# EAGLE board OpenBook_v24 (EAGLE 9.7.0)
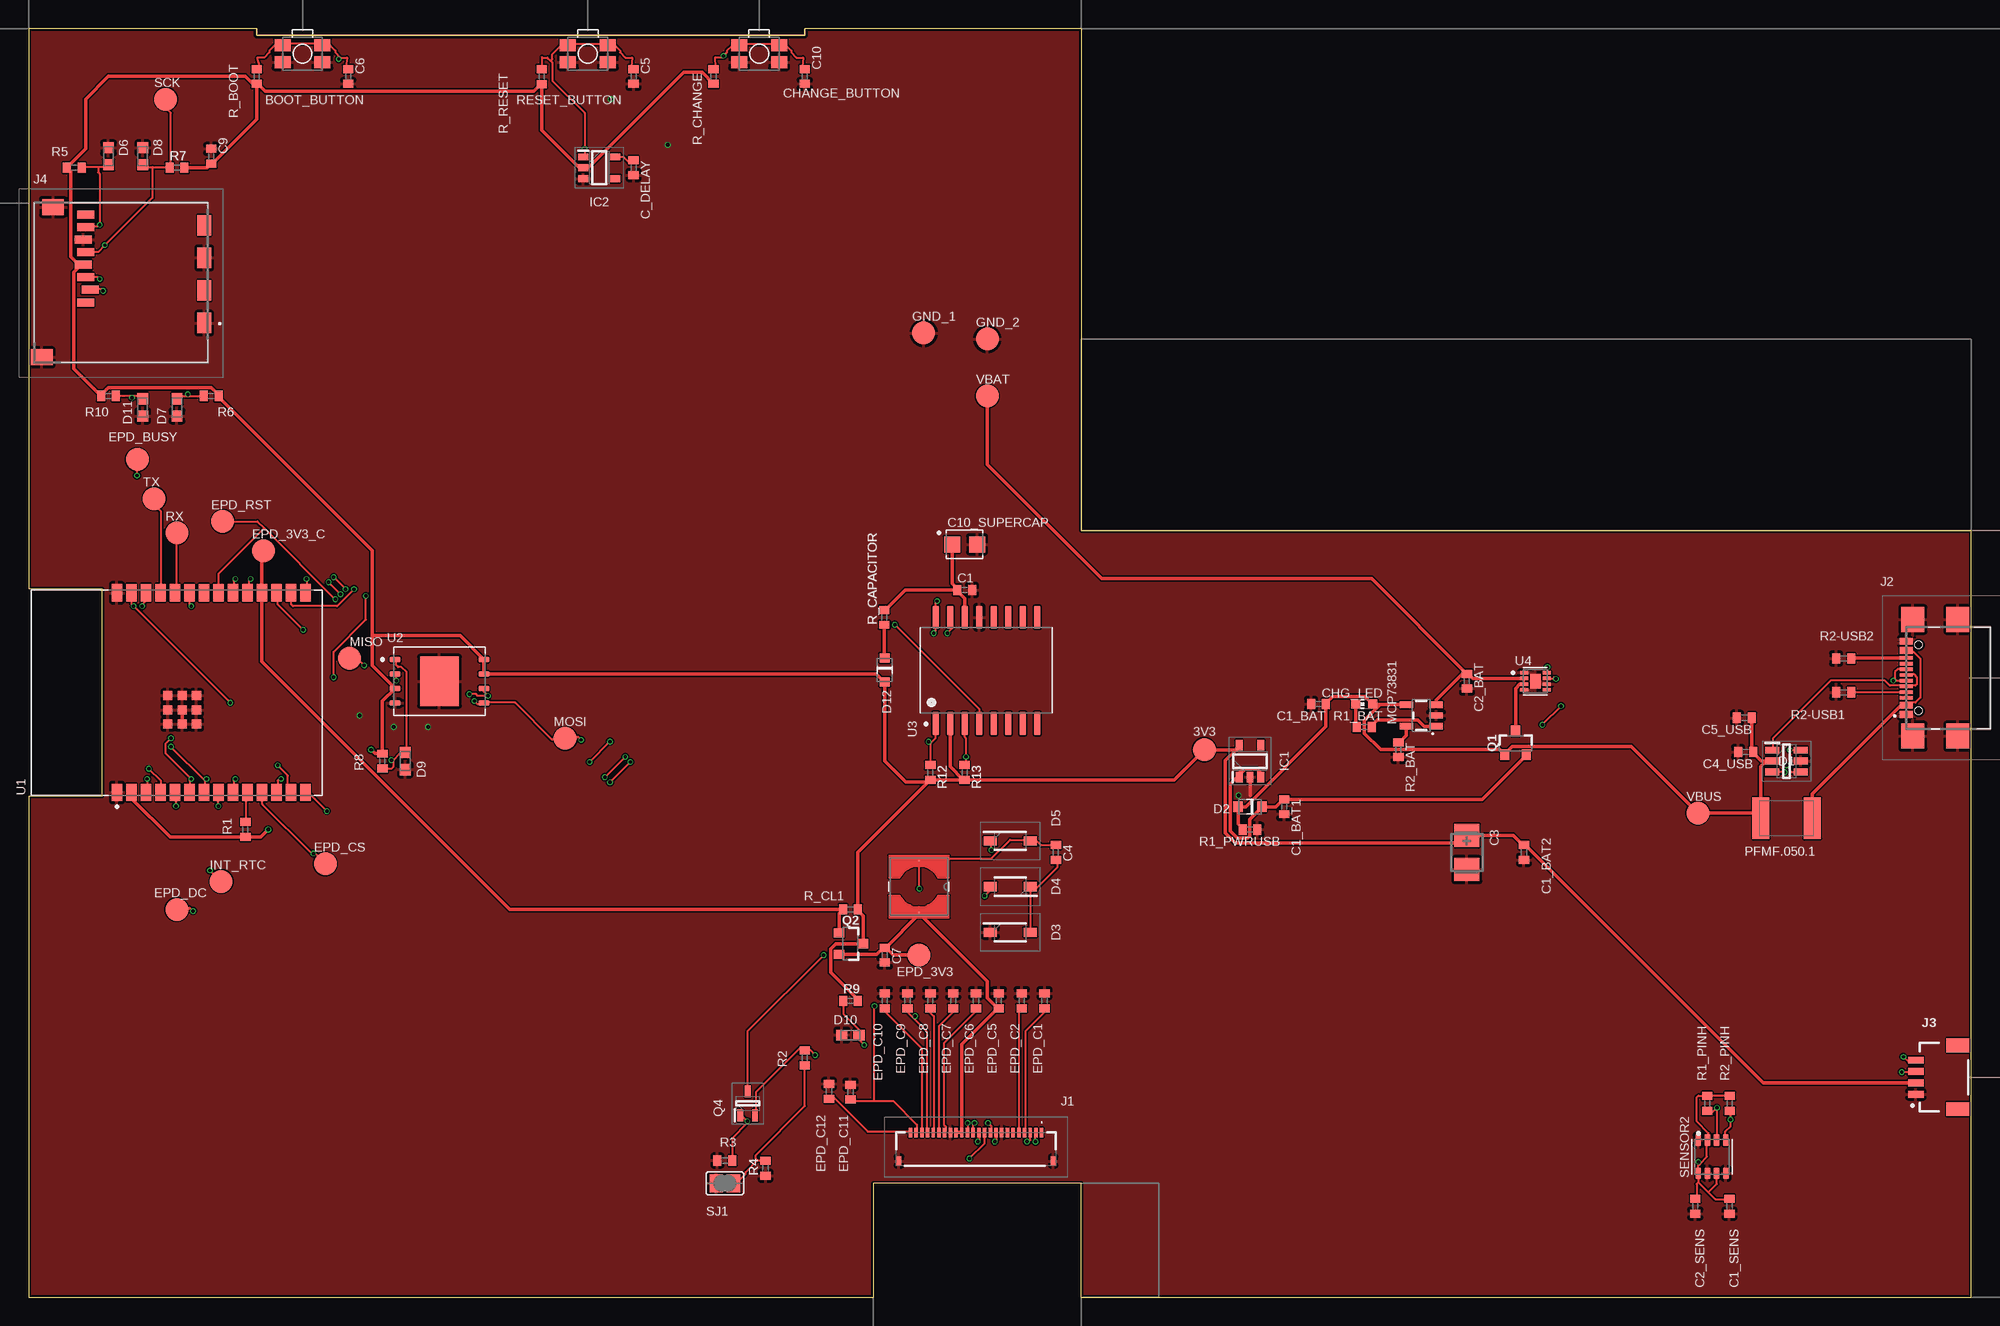
[diagram p0: board, top side]
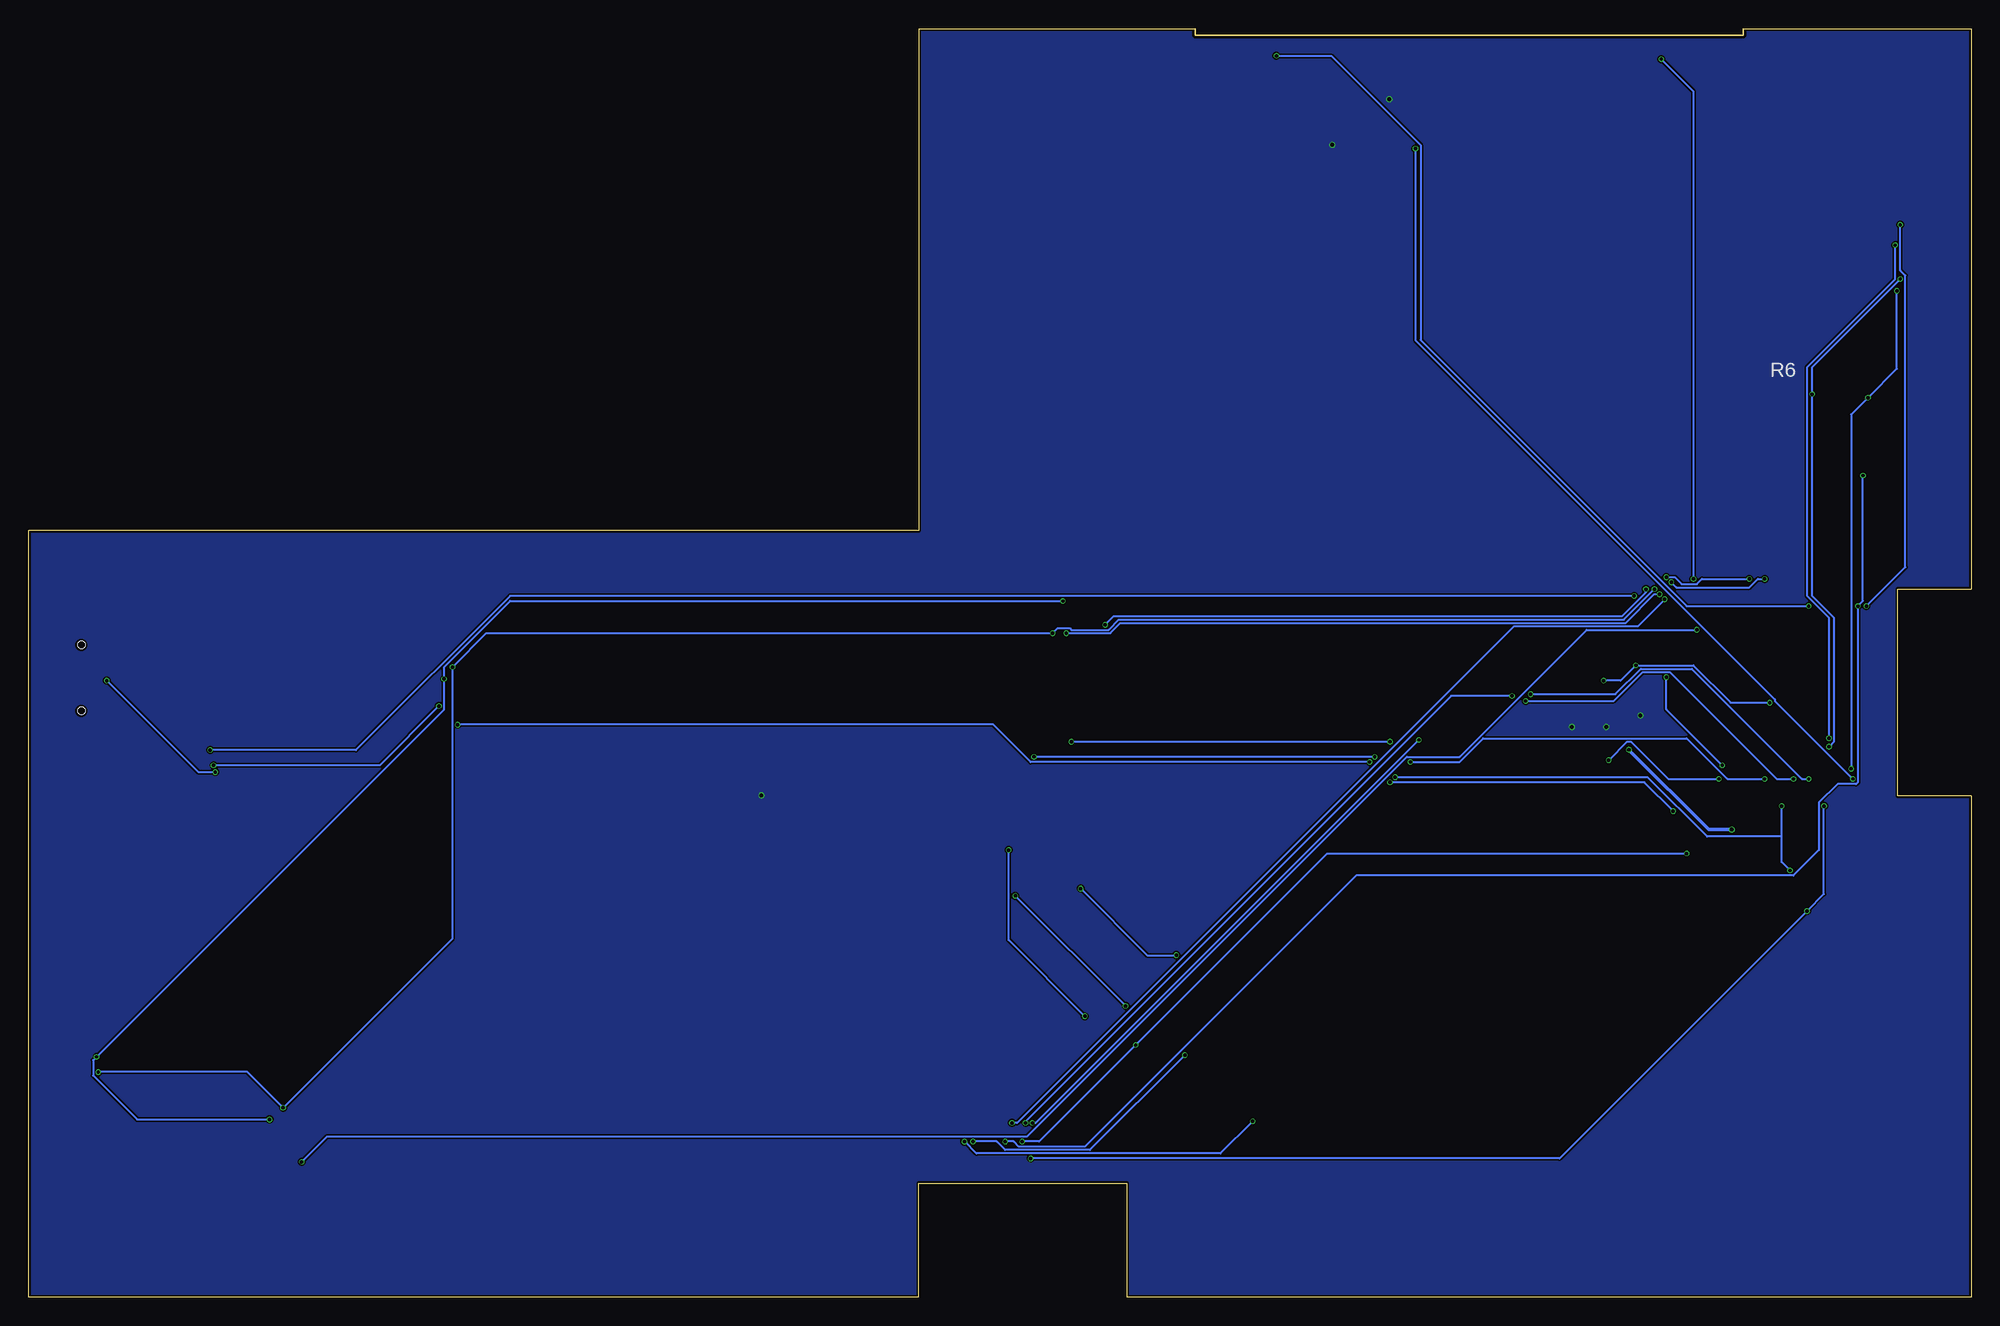
[diagram p1: board, bottom side, seen from below]

Size 170.2 x 111.2 mm. Coordinates in mm from the lower left corner, seen from the top.
Outline: 0,0 74,0 74,10 92.2,10 92.2,0 170.2,0 170.2,67.2 92.2,67.2 92.2,111.2 68.01,111.2 68.01,110.6 19.99,110.6 19.99,111.2 0,111.2 0,62.08 6.46,62.08 6.46,43.94 0,43.94 0,0
Copper layers (1*16): Top 0.035mm / dielectric 1.6mm / Bottom 0.035mm
Design rules "jlcpcb-2layers.dru": minimum track width 5mil, minimum drill 0.3mm, track to track 5mil, track to pad 5mil, pad to pad 5mil, via to via 5mil, smd to smd 5mil, copper to edge 0.2mm, drill to drill 6mil, minimum pad ring 10mil, minimum via ring 3mil, stop-mask expansion 4mil, vias tented up to drill 0mil, thermal gap 10mil

## Footprints (pad centres in the part's own frame; a part is rotated, then mirrored left to right if it is on the bottom)
TP20R = smd 2 x 2: TP 0,0
MYBUTTON = smd 1.4 x 1.05: 1 1.75,0.75; 2 -1.75,0.75; 3 -1.75,-0.75; 4 1.75,-0.75
EAGLE-LTSPICE_C0402 = smd 0.7 x 0.9: 1 -0.65,0; 2 0.65,0
RCL_CT3528 = smd 2 x 2.2: + -1.5,0; - 1.5,0
CAPCP3225X100N = smd 1.4 x 1.4: 1 -1.1,0; 2 1.1,0
ADAFRUIT_CHIP-LED0603 = smd 0.8 x 0.8: A 0,-0.75; C 0,0.75
SOT95P280X145-6N = smd 1.2 x 0.6: 1 -1.25,0.95; 2 -1.25,0; 3 -1.25,-0.95; 4 1.25,-0.95; 5 1.25,0; 6 1.25,0.95
ESP32_WROVER_AVX---SD0805S020S1R0_AVX_SD0805S020S1R0_0 = smd 0.8 x 0.9: 1 -1.05,0; 2 1.05,0
SOD3716X135N = smd 1.15 x 0.8: 1 -1.75,0; 2 1.75,0
DIOC1608X36N = smd 0.97 x 0.94: 1 -0.75,0; 2 0.75,0
SOT95P280X120-5N = smd 0.9 x 0.6: 1 -1.4,0.95; 2 -1.4,0; 3 -1.4,-0.95; 4 1.4,-0.95; 5 1.4,0.95
SOT95P280X125-5N = smd 0.9 x 0.6: 1 -1.4,0.95; 2 -1.4,0; 3 -1.4,-0.95; 4 1.4,-0.95; 5 1.4,0.95
FH34SRJ24S05SH99 = smd 0.3 x 0.8: 1 5.75,1.45; 2 5.25,1.45; 3 4.75,1.45; 4 4.25,1.45; 5 3.75,1.45; 6 3.25,1.45; 7 2.75,1.45; 8 2.25,1.45; 9 1.75,1.45; 10 1.25,1.45; 11 0.75,1.45; 12 0.25,1.45; 13 -0.25,1.45; 14 -0.75,1.45; 15 -1.25,1.45; 16 -1.75,1.45; 17 -2.25,1.45; 18 -2.75,1.45; 19 -3.25,1.45; 20 -3.75,1.45; 21 -4.25,1.45; 22 -4.75,1.45; 23 -5.25,1.45; 24 -5.75,1.45 | smd 0.4 x 0.8: MP1 6.75,-1.05; MP2 -6.75,-1.05
SAMACSYS_PARTS_USB4110GFA = smd 0.3 x 1.15: A1 -3.35,3.678; A4 -2.55,3.678; A5 -1.25,3.678; A6 -0.25,3.678; A7 0.25,3.678; A8 1.25,3.678; A9 2.55,3.678; A12 3.35,3.678; B1 3.05,3.678; B4 2.25,3.678; B5 1.75,3.678; B6 0.75,3.678; B7 -0.75,3.678; B8 -1.75,3.678; B9 -2.25,3.678; B12 -3.05,3.678 | smd 2.18 x 2: MP1 -5.11,-0.827; MP2 5.11,-0.827; MP3 -5.11,3.103; MP4 5.11,3.103 | hole 0.65: -2.89,2.603; 2.89,2.603
JST04_1MM_RA = smd 0.6 x 1.35: 1 -1.5,0; 2 -0.5,0; 3 0.5,0; 4 1.5,0 | smd 1.2 x 2: NC1 2.8,-3.675; NC2 -2.8,-3.675
112ATAARR03ATTEND = smd 1.8 x 1.2: G1 10.6,10.4; G2 4.9,10.4; S1 7.75,10.4; S2 2.05,10.4 | smd 1.4 x 1.9: G3 13.6,-3.85; G4 0.45,-2.85 | smd 0.7 x 1.5: P1 8.8,0; P2 7.7,0.4; P3 6.6,0; P4 5.5,-0.2; P5 4.4,0; P6 3.3,-0.2; P7 2.2,0; P8 1.1,0
IND_4828-WE-TPC_WRE = smd 0.127 x 0.127: 1 -2.286,0; 2 2.286,0
ESP32_WROVER_SPARKFUN-IC-POWER_SOT23-5 = smd 0.55 x 1.2: 1 -0.95,-1.3; 2 0,-1.3; 3 0.95,-1.3; 4 0.95,1.3; 5 -0.95,1.3
ESP32C6_VARISTOR_CT/CN1812 = smd 1.5 x 3.6: 1 -2.25,0; 2 2.25,0
ESP32_WROVER_SPARKFUN-DISCRETESEMI_SOT23-3 = smd 0.8 x 0.9: 1 -0.95,-1; 2 0.95,-1; 3 0,1.1
SOT65P210X110-3N = smd 1.05 x 0.5: 1 -1.05,0.65; 2 -1.05,-0.65; 3 1.05,0
R0402 = smd 0.7 x 0.9: 1 -0.65,0; 2 0.65,0
ESP32_WROVER_BME680_PSON80P300X300X100-8N = smd 1.016 x 0.5: 1 1.458,1.2; 2 1.458,0.4; 3 1.458,-0.4; 4 1.458,-1.2; 5 -1.458,-1.22; 6 -1.458,-0.4; 7 -1.458,0.4; 8 -1.458,1.2
SJ = smd 1.168 x 1.6: 1 -0.762,0; 2 0.762,0
XCVR_ESP32-C6-WROOM-1-N8 = smd 1.5 x 0.9: 1 -8.75,5.26; 2 -8.75,3.99; 3 -8.75,2.72; 4 -8.75,1.45; 5 -8.75,0.18; 6 -8.75,-1.09; 7 -8.75,-2.36; 8 -8.75,-3.63; 9 -8.75,-4.9; 10 -8.75,-6.17; 11 -8.75,-7.44; 12 -8.75,-8.71; 13 -8.75,-9.98; 14 -8.75,-11.25; 15 8.75,-11.25; 16 8.75,-9.98; 17 8.75,-8.71; 18 8.75,-7.44; 19 8.75,-6.17; 20 8.75,-4.9; 21 8.75,-3.63; 22 8.75,-2.36; 23 8.75,-1.09; 24 8.75,0.18; 25 8.75,1.45; 26 8.75,2.72; 27 8.75,3.99; 28 8.75,5.26 | smd 0.8 x 0.8: 29_1 -2.755,0.79; 29_2 -1.505,0.79; 29_3 -0.255,0.79; 29_4 -2.755,-0.46; 29_5 -1.505,-0.46; 29_6 -0.255,-0.46; 29_7 -2.755,-1.71; 29_8 -1.505,-1.71; 29_9 -0.255,-1.71
SON127P600X800X80-9N = smd 0.94 x 0.44: 1 -3.895,1.905; 2 -3.895,0.635; 3 -3.895,-0.635; 4 -3.895,-1.905; 5 3.895,-1.905; 6 3.895,-0.635; 7 3.895,0.635; 8 3.895,1.905 | smd 3.4 x 4.3: 9 0,0
SOIC127P1032X265-16N = smd 2.05 x 0.59: 1 -4.655,4.445; 2 -4.655,3.175; 3 -4.655,1.905; 4 -4.655,0.635; 5 -4.655,-0.635; 6 -4.655,-1.905; 7 -4.655,-3.175; 8 -4.655,-4.445; 9 4.655,-4.445; 10 4.655,-3.175; 11 4.655,-1.905; 12 4.655,-0.635; 13 4.655,0.635; 14 4.655,1.905; 15 4.655,3.175; 16 4.655,4.445
SON50P200X200X80-9N = smd 0.76 x 0.27: 1 -0.985,0.75; 2 -0.985,0.25; 3 -0.985,-0.25; 4 -0.985,-0.75; 5 0.985,-0.75; 6 0.985,-0.25; 7 0.985,0.25; 8 0.985,0.75 | smd 0.9 x 1.3: 9 0,0

## Placement (x,y rotation side)
3V3  TPTP20R  [TP20R]  103,48 90 top
BOOT_BUTTON  BUTTON_CUSYOMV1  [MYBUTTON]  24,109 180 top
C1  100nF  [EAGLE-LTSPICE_C0402]  82,62 0 top
C1_BAT  4.7uF  [EAGLE-LTSPICE_C0402]  113,52 180 top
C1_BAT1  4.7uF  [EAGLE-LTSPICE_C0402]  110,43 270 top
C1_BAT2  4.7uF  [EAGLE-LTSPICE_C0402]  131,39 90 top
C1_SENS  100nF  [EAGLE-LTSPICE_C0402]  149,8 270 top
C2_BAT  4.7uF  [EAGLE-LTSPICE_C0402]  126,54 270 top
C2_SENS  100nF  [EAGLE-LTSPICE_C0402]  146,8 270 top
C3  100uF TANT  [RCL_CT3528]  126,39 270 top
C4  4.7uF/25V  [EAGLE-LTSPICE_C0402]  90,39 90 top
C4_USB  100nF  [EAGLE-LTSPICE_C0402]  150.42,47.8 180 top
C5  1uF  [EAGLE-LTSPICE_C0402]  53,107 270 top
C5_USB  4.7uF  [EAGLE-LTSPICE_C0402]  150.31,50.8 180 top
C6  100nF  [EAGLE-LTSPICE_C0402]  28,107 270 top
C7  10uF  [EAGLE-LTSPICE_C0402]  75,30 270 top
C9  100nF  [EAGLE-LTSPICE_C0402]  16,100 90 top
C10  100nF  [EAGLE-LTSPICE_C0402]  68,107 270 top
C10_SUPERCAP  CPH3225A  [CAPCP3225X100N]  82,66 0 top
C_DELAY  100nF  [EAGLE-LTSPICE_C0402]  53,99 270 top
CHANGE_BUTTON  BUTTON_CUSYOMV1  [MYBUTTON]  64,109 180 top
CHG_LED  LG R971  [ADAFRUIT_CHIP-LED0603]  117,52 90 top
D1  USBLC6-2SC6Y  [SOT95P280X145-6N]  154,47 0 top
D2  ESP32_WROVER_AVX---SD0805S020S1R0_AVX_SD0805S020S1R0_0_0AVX_SD0805S020S1R0_0_0  [ESP32_WROVER_AVX---SD0805S020S1R0_AVX_SD0805S020S1R0_0]  107,43 180 top
D3  MBR0530  [SOD3716X135N]  86,32 0 top
D4  MBR0530  [SOD3716X135N]  86,36 180 top
D5  MBR0530  [SOD3716X135N]  86,40 0 top
D6  PGB1010603MR  [DIOC1608X36N]  7,100 270 top
D7  PGB1010603MR  [DIOC1608X36N]  13,78 90 top
D8  PGB1010603MR  [DIOC1608X36N]  10,100 270 top
D9  PGB1010603MR  [DIOC1608X36N]  33,47 90 top
D10  PGB1010603MR  [DIOC1608X36N]  72,23 0 top
D11  PGB1010603MR  [DIOC1608X36N]  10,78 90 top
D12  ESP32_WROVER_AVX---SD0805S020S1R0_AVX_SD0805S020S1R0_0_0AVX_SD0805S020S1R0_0_0  [ESP32_WROVER_AVX---SD0805S020S1R0_AVX_SD0805S020S1R0_0]  75,55 270 top
EPD_3V3  TPTP20R  [TP20R]  78,30 180 top
EPD_3V3_C  TPTP20R  [TP20R]  20.58,65.44 0 top
EPD_BUSY  TPTP20R  [TP20R]  9.53,73.44 0 top
EPD_C1  1uF/50V  [EAGLE-LTSPICE_C0402]  89,26 270 top
EPD_C2  1uF/50V  [EAGLE-LTSPICE_C0402]  87,26 270 top
EPD_C5  0.1uF/50V  [EAGLE-LTSPICE_C0402]  85,26 270 top
EPD_C6  1uF/50V  [EAGLE-LTSPICE_C0402]  83,26 270 top
EPD_C7  1uF/50V  [EAGLE-LTSPICE_C0402]  81,26 270 top
EPD_C8  1uF/50V  [EAGLE-LTSPICE_C0402]  79,26 270 top
EPD_C9  1uF/50V  [EAGLE-LTSPICE_C0402]  77,26 270 top
EPD_C10  1uF/50V  [EAGLE-LTSPICE_C0402]  75,26 270 top
EPD_C11  1uF/50V  [EAGLE-LTSPICE_C0402]  72,18 270 top
EPD_C12  1uF/50V  [EAGLE-LTSPICE_C0402]  70.12,18.07 270 top
EPD_CS  TPTP20R  [TP20R]  26,38 0 top
EPD_DC  TPTP20R  [TP20R]  13,34 0 top
EPD_RST  TPTP20R  [TP20R]  17,68 0 top
GND_1  TPTP20R  [TP20R]  78.41,84.52 0 top
GND_2  TPTP20R  [TP20R]  84,84 0 top
IC1  XC6220A331MR-G  [SOT95P280X120-5N]  107,47 90 top
IC2  BD5229G-TR  [SOT95P280X125-5N]  50,99 0 top
INT_RTC  TPTP20R  [TP20R]  16.88,36.44 0 top
J1  FH34SRJ-24S-0.5SH_99_  [FH34SRJ24S05SH99]  83,13 0 top
J2  SAMACSYS_PARTS_USB4110-GF-A  [SAMACSYS_PARTS_USB4110GFA]  168.17,54.3 90 top
J3  QWIIC_RIGHT_ANGLE  [JST04_1MM_RA]  165.32,19.3 90 top
J4  112A-TAAR-R03_ATTEND  [112ATAARR03ATTEND]  5,96 270 top
L1  68uH  [IND_4828-WE-TPC_WRE]  78,36 270 top
MCP73831  ESP32_WROVER_SPARKFUN-IC-POWER_MCP73831  [ESP32_WROVER_SPARKFUN-IC-POWER_SOT23-5]  122,51 90 top
MISO  TPTP20R  [TP20R]  28.13,56 0 top
MOSI  TPTP20R  [TP20R]  47,49 0 top
PFMF.050.1  ESP32C6_VARISTORCN1812  [ESP32C6_VARISTOR_CT/CN1812]  154,42 180 top
Q1  20V/4.2A/52mΩ/1.4W  [ESP32_WROVER_SPARKFUN-DISCRETESEMI_SOT23-3]  130.26,48.56 0 top
Q2  20V/4.2A/52mΩ/1.4W  [ESP32_WROVER_SPARKFUN-DISCRETESEMI_SOT23-3]  72,31 270 top
Q4  SI1308EDL-T1-GE3  [SOT65P210X110-3N]  63,17 90 top
R1  10K  [R0402]  19,41 270 top
R1_BAT  200  [R0402]  117,50 180 top
R1_PINH  10K  [R0402]  147.05,17 90 top
R1_PWRUSB  100K  [R0402]  107,41 180 top
R2  0.47  [R0402]  68,21 270 top
R2-USB1  5k1  [R0402]  159,53.03 0 top
R2-USB2  5k1  [R0402]  159,56 180 top
R2_BAT  2K  [R0402]  120,48 270 top
R2_PINH  10K  [R0402]  149.03,17 90 top
R3  10K  [R0402]  61,12 180 top
R4  2.2  [R0402]  64.56,11.33 90 top
R5  10K  [R0402]  4,99 180 top
R6  10K  [R0402]  16,79 0 top
R7  10K  [R0402]  13,99 0 top
R8  10K  [R0402]  31,47 90 top
R9  10K  [R0402]  72,26 0 top
R10  10K  [R0402]  7,79 180 top
R12  10K  [R0402]  79,46 270 top
R13  10K  [R0402]  82,46 270 top
R_BOOT  10K  [R0402]  20,107 90 top
R_CAPACITOR  15  [R0402]  74.96,59.6 90 top
R_CHANGE  10K  [R0402]  60,107 90 top
R_CL1  10K  [R0402]  72,34 180 top
R_RESET  10K  [R0402]  44.96,106.99 90 top
RESET_BUTTON  BUTTON_CUSYOMV1  [MYBUTTON]  49,109 180 top
RX  TPTP20R  [TP20R]  13,67 0 top
SCK  TPTP20R  [TP20R]  12,105 0 top
SENSOR2  BME688  [ESP32_WROVER_BME680_PSON80P300X300X100-8N]  147.47,12.34 90 top
SJ1  [SJ]  61,10 0 top
TX  TPTP20R  [TP20R]  11,70 0 top
U1  ESP32-C6-WROOM-1-N8  [XCVR_ESP32-C6-WROOM-1-N8]  13,53 90 top
U2  W25Q512JVEIQ  [SON127P600X800X80-9N]  36,54 0 top
U3  DS3231SN#  [SOIC127P1032X265-16N]  83.9,54.95 90 top
U4  MAX17048G+T10  [SON50P200X200X80-9N]  132,54 0 top
VBAT  TPTP20R  [TP20R]  84,79 0 top
VBUS  TPTP20R  [TP20R]  146.23,42.44 0 top

## Library data of the parts
3V3 BOOT_BUTTON CHANGE_BUTTON CHG_LED EPD_3V3 EPD_3V3_C EPD_BUSY EPD_CS EPD_DC EPD_RST GND_1 GND_2 INT_RTC MISO MOSI PFMF.050.1 RESET_BUTTON RX SCK SJ1 TX VBAT VBUS = DeskAssistant v19 v1
C1 C1_BAT C1_BAT1 C1_BAT2 C1_SENS C2_BAT C2_SENS C4 C4_USB C5 C5_USB C6 C7 C9 C10 C_DELAY EPD_C1 EPD_C2 EPD_C5-EPD_C12 = DeskAssistant v19 v1; SPICEMODEL: NONE; SPICEPREFIX: C
C3 = DeskAssistant v19 v1; SPICEPREFIX: C
C10_SUPERCAP = DeskAssistant v19 v1; AVAILABILITY: Not in stock; CHECK_PRICES: https://www.snapeda.com/parts/CPH3225A/Seiko+Instruments/view-part/?ref=eda; DESCRIPTION: 11 mF (EDLC) Supercapacitor 3.3 V 1210 (3225 Metric) - -; MF: Seiko Instruments; MP: CPH3225A; PACKAGE: 1210 Seiko; PRICE: None; PURCHASE-URL: https://www.snapeda.com/api/url_track_click_mouser/?unipart_id=562593&manufacturer=Seiko Instruments&part_name=CPH3225A&search_term=None; SNAPEDA_LINK: https://www.snapeda.com/parts/CPH3225A/Seiko+Instruments/view-part/?ref=snap
D1 = DeskAssistant v19 v1; AVAILABILITY: In Stock; CHECK_PRICES: https://www.snapeda.com/parts/USBLC6-2SC6Y/STMicroelectronics/view-part/?ref=eda; DESCRIPTION: 17V Clamp 5A (8/20µs) Ipp Tvs Diode Surface Mount SOT-23-6; MF: STMicroelectronics; MP: USBLC6-2SC6Y; PACKAGE: SOT-23-6 STMicroelectronics; PRICE: None; SNAPEDA_LINK: https://www.snapeda.com/parts/USBLC6-2SC6Y/STMicroelectronics/view-part/?ref=snap
D2 D12 = DeskAssistant v19 v1; CENTROID_NOT_SPECIFIED: No; DATASHEET: http://datasheets.avx.com/schottky.pdf; DIGIKEY_DESCRIPTION: DIODE SCHOTTKY 20V 1A 0805; DIGIKEY_PART_NUMBER: 478-7800-1-ND; LEAD_FREE: yes; MF: AVX; MOUSER_PART_NUMBER: 581-SD0805S020S1R0; PACKAGE: 0805 (2012 metric); PREFIX: D; ROHS: yes; TEMPERATURE_RANGE_HIGH: +125°C; TEMPERATURE_RANGE_LOW: -55°C
D3-D5 = DeskAssistant v19 v1; AVAILABILITY: In Stock; CHECK_PRICES: https://www.snapeda.com/parts/MBR0530/Onsemi/view-part/?ref=eda; DESCRIPTION: Diode Schottky 30 V 500mA Surface Mount SOD-123; MF: ON Semiconductor; MP: MBR0530; PACKAGE: SOD-123-2 ON Semiconductor; PRICE: None; PURCHASE-URL: https://www.snapeda.com/api/url_track_click_mouser/?unipart_id=179458&manufacturer=ON Semiconductor&part_name=MBR0530&search_term=None; SNAPEDA_LINK: https://www.snapeda.com/parts/MBR0530/Onsemi/view-part/?ref=snap
D6-D11 = DeskAssistant v19 v1; AVAILABILITY: In Stock; CHECK_PRICES: https://www.snapeda.com/parts/PGB1010603MR/Littelfuse/view-part/?ref=eda; DESCRIPTION: 150V (Typ) Clamp - Ipp Tvs Diode Surface Mount 0603 (1608 Metric); MF: Littelfuse Inc.; MP: PGB1010603MR; PACKAGE: 0603 Littelfuse Inc.; PRICE: None; PURCHASE-URL: https://www.snapeda.com/api/url_track_click_mouser/?unipart_id=5659453&manufacturer=Littelfuse Inc.&part_name=PGB1010603MR&search_term=None; SNAPEDA_LINK: https://www.snapeda.com/parts/PGB1010603MR/Littelfuse/view-part/?ref=snap
IC1 = DeskAssistant v19 v1; DESCRIPTION: LDO Voltage Regulators; HEIGHT: 1.2mm; MANUFACTURER_NAME: Torex; MANUFACTURER_PART_NUMBER: XC6220A331MR-G; MOUSER_PART_NUMBER: 865-XC6220A331MR-G; MOUSER_PRICE-STOCK: https://www.mouser.co.uk/ProductDetail/Torex-Semiconductor/XC6220A331MR-G?qs=AsjdqWjXhJ8ZSWznL1J0gg%3D%3D
IC2 = DeskAssistant v19 v1; DESCRIPTION: Voltage Detector with Adjustable Delay Time: CMOS processes are utilized to develop high precision, low current consumption CMOS reset ICs that allow arbitrary setting of the delay time. The extensive lineup includes both Nch Open Drain and CMOS output types in a wide range of detection voltages (from 2.3V to 6.0V, in 0.1V steps), enabling selection of the ideal solution based on customer requirements. In addition, the entire series is of course both lead-free and RoHS-compliant.; HEIGHT: 1.25mm; MANUFACTURER_NAME: ROHM Semiconductor; MANUFACTURER_PART_NUMBER: BD5229G-TR; MOUSER_PART_NUMBER: 755-BD5229G-TR; MOUSER_PRICE-STOCK: https://www.mouser.co.uk/ProductDetail/ROHM-Semiconductor/BD5229G-TR?qs=4kLU8WoGk0vvnhrrYwdszw%3D%3D
J1 = DeskAssistant v19 v1; DESCRIPTION: 24 Position FFC, FPC Connector Contacts, Top and Bottom 0.020" (0.50mm) Surface Mount, Right Angle; HEIGHT: 1.1mm; MANUFACTURER_NAME: Hirose; MANUFACTURER_PART_NUMBER: FH34SRJ-24S-0.5SH(99); MOUSER_PART_NUMBER: 798-FH34SRJ24S05SH99; MOUSER_PRICE-STOCK: https://www.mouser.co.uk/ProductDetail/Hirose-Connector/FH34SRJ-24S-0.5SH99?qs=vcbW%252B4%252BSTIpKBl5ap9J8Fw%3D%3D
J2 = DeskAssistant v19 v1; DESCRIPTION: CONN USB 2.0 TYPE-C R/A SMT; HEIGHT: 3.26mm; MANUFACTURER_NAME: GCT (GLOBAL CONNECTOR TECHNOLOGY); MANUFACTURER_PART_NUMBER: USB4110-GF-A; MOUSER_PART_NUMBER: 640-USB4110-GF-A; MOUSER_PRICE-STOCK: https://www.mouser.co.uk/ProductDetail/GCT/USB4110-GF-A?qs=KUoIvG%2F9IlYiZvIXQjyJeA%3D%3D
J3 = DeskAssistant v19 v1; PROD_ID: CONN-13694
J4 = DeskAssistant v19 v1; DESCRIPTION: Micro SD Card Socket, Push-Push Type, Top Mount, SMT, H=1.83mm, 10u; HEIGHT: 1.9mm; MANUFACTURER_NAME: ATTEND; MANUFACTURER_PART_NUMBER: 112A-TAAR-R03 ATTEND
L1 = DeskAssistant v19 v1; COPYRIGHT: Copyright (C) 2024 Ultra Librarian. All rights reserved.; MANUFACTURER_PART_NUMBER: 744043680; MFR_NAME: Wurth Electronics
MCP73831 = DeskAssistant v19 v1; PROD_ID: IC-09995
Q1 Q2 = DeskAssistant v19 v1; PROD_ID: DMG2305UX-7
Q4 = DeskAssistant v19 v1; AVAILABILITY: In Stock; CHECK_PRICES: https://www.snapeda.com/parts/SI1308EDL-T1-GE3/Vishay+Siliconix/view-part/?ref=eda; DESCRIPTION: Si1308EDL-T1-GE3 N-channel MOSFET Transistor, 1.5 A, 30 V, 3-Pin SC-70 | Siliconix / Vishay SI1308EDL-T1-GE3; MF: Vishay Siliconix; MP: SI1308EDL-T1-GE3; PACKAGE: SOT-323 Vishay Semiconductor; PRICE: None; PURCHASE-URL: https://www.snapeda.com/api/url_track_click_mouser/?unipart_id=274603&manufacturer=Vishay Siliconix&part_name=SI1308EDL-T1-GE3&search_term=None; SNAPEDA_LINK: https://www.snapeda.com/parts/SI1308EDL-T1-GE3/Vishay+Siliconix/view-part/?ref=snap
R1 R1_BAT R1_PINH R1_PWRUSB R2 R2-USB1 R2-USB2 R2_BAT R2_PINH R3-R10 R12 R13 R_BOOT R_CAPACITOR R_CHANGE R_CL1 R_RESET = DeskAssistant v19 v1; SPICEMODEL: NONE; SPICEPREFIX: R
SENSOR2 = DeskAssistant v19 v1; AVAILABILITY: Unavailable; DESCRIPTION: Integrated Environmental Unit; MF: Bosch Sensortec; MP: BME680; PACKAGE: LGA-8 Bosch Tools; PRICE: None
U1 = DeskAssistant v19 v1; AVAILABILITY: In Stock; CHECK_PRICES: https://www.snapeda.com/parts/ESP32-C6-WROOM-1-N8/Espressif+Systems/view-part/?ref=eda; DESCRIPTION: Multiprotocol Modules ESP32-C6 module, Wi-Fi 6 in 2.4 GHz band, Bluetooth 5, Zigbee 3.0 and Thread. ESP34-WROOM Compatible - ENGINEERING SAMPLE; MF: Espressif Systems; MP: ESP32-C6-WROOM-1-N8; PACKAGE: None; PRICE: None; SNAPEDA_LINK: https://www.snapeda.com/parts/ESP32-C6-WROOM-1-N8/Espressif+Systems/view-part/?ref=snap
U2 = DeskAssistant v19 v1; AVAILABILITY: In Stock; CHECK_PRICES: https://www.snapeda.com/parts/W25Q512JVEIQ/Winbond+Electronics/view-part/?ref=eda; DESCRIPTION: FLASH - NOR Memory IC 512Mb (64M x 8) SPI - Quad I/O 133 MHz 8-WSON (8x6); MF: Winbond Electronics; MP: W25Q512JVEIQ; PACKAGE: Package; PRICE: None; SNAPEDA_LINK: https://www.snapeda.com/parts/W25Q512JVEIQ/Winbond+Electronics/view-part/?ref=snap
U3 = DeskAssistant v19 v1; AVAILABILITY: In Stock; CHECK_PRICES: https://www.snapeda.com/parts/DS3231SN%23/Analog+Devices/view-part/?ref=eda; DESCRIPTION: Extremely Accurate I²C-Integrated RTC/TCXO/Crystal; MF: Analog Devices; MP: DS3231SN#; PACKAGE: SOIC-16 Maxim; PRICE: None; PURCHASE-URL: https://www.snapeda.com/api/url_track_click_mouser/?unipart_id=99048&manufacturer=Analog Devices&part_name=DS3231SN#&search_term=None; SNAPEDA_LINK: https://www.snapeda.com/parts/DS3231SN%23/Analog+Devices/view-part/?ref=snap
U4 = DeskAssistant v19 v1; AVAILABILITY: In Stock; CHECK_PRICES: https://www.snapeda.com/parts/MAX17048G+T10/Analog+Devices/view-part/?ref=eda; DESCRIPTION: 3µA 1-Cell/2-Cell Fuel Gauge with ModelGauge; MF: Analog Devices; MP: MAX17048G+T10; PACKAGE: TDFN-8 Maxim; PRICE: None; PURCHASE-URL: https://www.snapeda.com/api/url_track_click_mouser/?unipart_id=329239&manufacturer=Analog Devices&part_name=MAX17048G+T10&search_term=None; SNAPEDA_LINK: https://www.snapeda.com/parts/MAX17048G+T10/Analog+Devices/view-part/?ref=snap

## Nets
3V3: 3V3.TP C1_BAT2.2 C3.+ C9.1 D12.2 IC1.5 IC2.2 J3.2 J4.P4 Q2.3 R1.2 R5.2 R6.2 R7.2 R8.2 R9.2 R10.2 R12.2 R13.2 R_BOOT.1 R_CHANGE.1 R_CL1.1 R_RESET.1 U1.2 U2.3 U2.7 U2.8 U3.2
12C_PW: C1_SENS.1 C2_SENS.1 R1_PINH.2 R2_PINH.2 SENSOR2.2 SENSOR2.6 SENSOR2.8 U1.17
32KHZ: R12.1 U1.9 U3.1
DN: D1.1 J2.A7 J2.B7
DP: D1.3 J2.A6 J2.B6
EPD_3V3: C7.1 EPD_3V3.TP EPD_C5.2 J1.15 J1.16 L1.2 Q2.2
EPD_3V3_C: EPD_3V3_C.TP Q2.1 R_CL1.2 U1.18
EPD_BUSY: EPD_BUSY.TP J1.9 U1.26
EPD_CS: D10.2 EPD_CS.TP J1.12 R9.1 U1.11
EPD_DC: EPD_DC.TP J1.11 U1.5
EPD_RST: EPD_RST.TP J1.10 U1.21
FLASH_CS: D9.2 R8.1 U1.12 U2.1
GDR: J1.2 Q4.1 R3.1
GND: BOOT_BUTTON.1 BOOT_BUTTON.2 C1.2 C1_BAT1.2 C1_BAT2.1 C1_BAT.2 C1_SENS.2 C2_BAT.2 C2_SENS.2 C3.- C4_USB.2 C5.2 C5_USB.2 C6.2 C7.2 C9.2 C10.2 C10_SUPERCAP.2 C_DELAY.2 CHANGE_BUTTON.1 CHANGE_BUTTON.2 D1.5 D3.1 D6.1 D7.1 D8.1 D9.1 D10.1 D11.1 EPD_C1.1 EPD_C2.1 EPD_C5.1 EPD_C6.1 EPD_C7.1 EPD_C8.1 EPD_C9.1 EPD_C10.1 EPD_C11.1 EPD_C12.1 GND_1.TP GND_2.TP IC1.2 IC2.3 J1.8 J1.17 J1.MP1 J1.MP2 J2.A1 J2.A12 J2.B1 J2.B12 J2.MP1 J2.MP2 J2.MP3 J2.MP4 J3.1 J4.G1 J4.G2 J4.G3 J4.G4 J4.P6 MCP73831.2 R1_PWRUSB.1 R2-USB1.1 R2-USB2.2 R2_BAT.2 R3.2 R4.1 RESET_BUTTON.1 RESET_BUTTON.2 SENSOR2.1 SENSOR2.5 SENSOR2.7 SJ1.1 U1.1 U1.28 U1.29_1 U1.29_2 U1.29_3 U1.29_4 U1.29_5 U1.29_6 U1.29_7 U1.29_8 U1.29_9 U2.4 U2.9 U3.13 U4.1 U4.4 U4.6 U4.9
GND1: J2.B5 R2-USB2.1
GPIO8: R1.1 U1.10
INT_RTC: INT_RTC.TP R13.1 U1.8 U3.3
IO/BOOT: BOOT_BUTTON.3 BOOT_BUTTON.4 C6.1 R_BOOT.2 U1.15
IO/CHANGE: C10.1 CHANGE_BUTTON.3 CHANGE_BUTTON.4 R_CHANGE.2 U1.23
MISO: D6.2 J4.P7 MISO.TP R5.1 U1.27 U2.2
MOSI: D7.2 J1.14 J4.P3 MOSI.TP R6.1 U1.7 U2.5
N$1: J2.A5 R2-USB1.2
N$2: EPD_C7.2 J1.19
N$3: MCP73831.1 R1_BAT.1
N$4: C1_BAT1.1 D2.1 IC1.1 IC1.3 Q1.2
N$5: CHG_LED.C R1_BAT.2
N$6: EPD_C6.2 J1.18
N$7: MCP73831.5 R2_BAT.1
N$8: C4.1 D3.2 D4.1
N$10: EPD_C8.2 J1.20
N$11: EPD_C10.2 J1.22
N$13: EPD_C12.2 J1.24
N$17: C_DELAY.1 IC2.5
N$22: EPD_C2.2 J1.5
N$23: EPD_C1.2 J1.4
N$26: D12.1 R_CAPACITOR.1
PREVGH: D5.1 EPD_C9.2 J1.21
PREVGL: D4.2 EPD_C11.2 J1.23
RESE: J1.3 Q4.2 R2.1
RESE': R2.2 R4.2 SJ1.2
RESET: C5.1 IC2.1 R_RESET.2 RESET_BUTTON.3 RESET_BUTTON.4 U1.3
RTC_RST: U1.16 U3.4
RX: RX.TP U1.24
SCK: D8.2 J1.13 J4.P5 R7.1 SCK.TP U1.6 U2.6
SCL: J3.4 R2_PINH.1 SENSOR2.4 U1.20 U3.16 U4.7
SDA: J3.3 R1_PINH.1 SENSOR2.3 U1.19 U3.15 U4.8
SRC: C4.2 D5.2 L1.1 Q4.3
SS_SD: D11.2 J4.P2 R10.1 U1.4
TX: TX.TP U1.25
USB_D+: D1.4 U1.14
USB_D-: D1.6 U1.13
VBAT: C2_BAT.1 MCP73831.3 Q1.3 U4.2 U4.3 VBAT.TP
VBUS: C1_BAT.1 C4_USB.1 C5_USB.1 CHG_LED.A D1.2 D2.2 MCP73831.4 PFMF.050.1.2 Q1.1 R1_PWRUSB.2 VBUS.TP
VRTC: C1.1 C10_SUPERCAP.1 R_CAPACITOR.2 U3.14
VUSB: J2.A4 J2.A9 J2.B4 J2.B9 PFMF.050.1.1

## Tracks (layer width: path | path; a pad name or v marks a point on that pad's centre or on a via)
3V3  (via drill 0.35)
  Top 0.305: R7.2 15.65,99 C9.1 16.1,99.35 20,103.25 20,106 | 20,106 R_BOOT.1 20.05,106.4 20.73,105.72 44.24,105.72 44.91,106.39 R_RESET.1 44.96,102.27 48.23,99 IC2.2 49.05,99 57.4,107.35 59,107.35 R_CHANGE.1 | 20,106 19,107 7,107 5,105 5,100.65 R5.2 3.7,98.65 3.7,91.2 4.4,90.5 J4.P4 4.61,90.5 3.97,89.87 3.97,81.38 R10.2 6.35,79.1 6.98,79.73 16.02,79.73 16.65,79.1 R6.2 16.65,78.9 30.1,65.45 30.1,58 | 30.1,58 30.1,55.37 U2.3 31,52.26 R8.2 30.35,47.65 v30,48 | U1.2 9.01,43.73 12.39,40.35 R1.2 20.35,40.35 v21,41 | 30.1,58 37.8,58 U2.8 U2.7 74.27,54.63 74.95,53.95 D12.2 75,47 76.83,45.17 78.83,45.17 | R9.2 72.65,26.1 70.27,28.48 70.27,30.57 70.7,31 Q2.3 73.1,33.45 72.65,33.9 R_CL1.1 72.65,39 78.83,45.17 | 78.83,45.17 R12.2 R13.2 | R13.2 81.9,45.35 80.72,46.52 U3.2 | 105.8,48 106.05,48.25 IC1.5 105.8,48 | 105.8,48 3V3.TP 100.35,45.35 R13.2 | J3.2 151.95,18.8 131.1,39.65 C1_BAT2.2 130.9,39.65 130.05,40.5 C3.+ 125.34,39.84 105.7,39.84 104.84,40.7 104.84,47.04 105.8,48
  Bottom 0.305: v30,48 23,41 v21,41
12C_PW  (via drill 0.3)
  Top 0.17: R2_PINH.2 148.95,17.67 147.16,17.67 R1_PINH.2 147.01,17.67 146.27,17.67 146.12,17.52 146.12,15.44 147.16,14.4 147.16,13.81 SENSOR2.2 147.01,13.66 147.01,12.32 146.42,11.73 | 146.27,10.1 146.12,9.95 146.12,8.76 C2_SENS.1 | 146.27,10.1 146.27,10.84 SENSOR2.8 146.27,10.99 146.27,11.58 146.42,11.73 | 146.27,10.1 147.16,9.21 | 147.16,9.21 147.76,8.61 148.95,8.61 C1_SENS.1 | 147.16,9.21 147.91,9.95 147.91,10.84 SENSOR2.6 | v24.06,58.51 21.83,60.74 21.83,61.63 U1.17 | 146.42,11.73 v146.27,11.88
  Bottom 0.17: v24.06,58.51 33.71,58.51 44.85,47.37 49.45,47.37 82.72,14.11 144.04,14.11 v146.27,11.88
32KHZ  (via drill 0.3)
  Top 0.17: 79,48.56 79,46.78 R12.1 | 79,48.56 79.45,49.01 79.45,50.19 U3.1 | v18.12,45.44 17.97,45.29 17.97,44.25 U1.9 | v50.94,48.71 v49.15,46.93 | 79,48.56 v78.85,48.71
  Bottom 0.17: v18.12,45.44 21.38,45.44 24.95,49.01 42.77,49.01 44.85,46.93 v49.15,46.93 | v78.85,48.71 v50.94,48.71
DN
  Top 0.17: J2.A7 164.54,54.65 165.13,54.65 165.43,54.35 165.43,53.76 165.28,53.61 164.54,53.61 J2.B7 164.39,53.61 163.05,53.61 162.61,54.05 157.86,54.05 152.81,49.01 152.81,47.97 D1.1
DP  (via drill 0.3)
  Top 0.17: 163.5,54.2 163.65,54.05 164.39,54.05 J2.A6 | 163.5,54.2 163.5,54.8 163.8,55.09 164.39,55.09 J2.B6 | v153.85,46.03 152.81,46.03 D1.3 | 163.5,54.2 v163.35,54.05
  Bottom 0.17: v153.85,46.03 155.33,46.03 v163.35,54.05
EPD_3V3
  Top 0.305: Q2.2 74.3,30.05 74.9,30.65 C7.1 75.1,30.65 | 75.1,30.65 78,33.55 L1.2 84,27.71 84,26.25 84.9,25.35 | J1.16 J1.15 81.75,22.2 84.9,25.35 | 84.9,25.35 EPD_C5.2 | EPD_3V3.TP 75.75,30 75.1,30.65
EPD_3V3_C
  Top 0.305: EPD_3V3_C.TP 20.44,65.3 U1.18 20.44,55.72 42.16,34 R_CL1.2 71,33.65 Q2.1
EPD_BUSY  (via drill 0.3)
  Top 0.17: v84.64,13.66 84.79,13.81 84.79,14.4 J1.9 | v9.95,60.59 9.95,60.74 10.25,61.03 10.25,61.63 U1.26 | v9.5,72.02 9.5,73.36 EPD_BUSY.TP
  Bottom 0.17: v84.64,13.66 83.9,13.66 83.46,13.22 77.67,13.22 53.91,36.98 15.59,36.98 13.37,39.2 13.37,43.36 11.73,44.99 10.1,44.99 9.95,45.14 v9.95,60.59 9.5,61.03 v9.5,72.02
EPD_CS  (via drill 0.3)
  Top 0.17: U1.11 20.49,44.1 20.49,43.21 24.8,38.91 v24.95,38.91 25.1,38.91 25.99,38.02 EPD_CS.TP | v83.16,13.66 83.31,13.81 83.31,14.4 J1.12 | v73.21,22.13 72.77,22.57 72.77,22.87 D10.2 72.77,23.02 72.77,23.46 71.43,24.8 71.43,25.99 R9.1
  Bottom 0.17: v83.16,13.66 81.67,13.66 v73.21,22.13 56.43,38.91 v24.95,38.91
EPD_DC  (via drill 0.3)
  Top 0.17: v82.42,12.18 83.75,13.51 83.75,14.4 J1.11 | v14.4,33.86 14.11,34.16 13.96,34.01 13.07,34.01 EPD_DC.TP | v12.92,43.06 12.92,44.1 U1.5
  Bottom 0.17: v82.42,12.18 36.09,12.18 v14.4,33.86 12.92,35.34 v12.92,43.06
EPD_RST  (via drill 0.3)
  Top 0.17: v84.05,15.3 84.35,15 84.35,14.55 J1.10 | 20.64,67.42 20.05,68.01 17.08,68.01 EPD_RST.TP | 20.64,67.42 v26.88,61.18 | 20.64,67.42 16.63,63.41 16.63,61.78 U1.21
  Bottom 0.17: v84.05,15.3 83.61,15.3 40.09,58.81 29.25,58.81 v26.88,61.18
FLASH_CS  (via drill 0.3)
  Top 0.17: 31.93,47.08 31.93,46.48 31.78,46.33 31.04,46.33 R8.1 | 31.93,47.08 32.52,47.67 32.97,47.67 D9.2 33.12,47.82 33.12,54.8 32.67,55.24 32.37,55.24 32.22,55.39 32.22,55.84 U2.1 | v22.13,45.44 21.98,45.44 21.83,45.29 21.83,44.25 U1.12 | 31.93,47.08 v31.78,47.08
  Bottom 0.17: v22.13,45.44 26.58,45.44 29.85,48.71 30.14,48.71 v31.78,47.08
GDR  (via drill 0.3)
  Top 0.17: v88.21,13.66 88.21,14.4 J1.2 | Q4.1 62.22,15.89 62.37,15.74 62.52,15.89 v62.96,15.44 62.96,15.3 61.63,13.96 61.63,12.03 R3.1
  Bottom 0.17: v88.21,13.66 87.17,12.62 65.78,12.62 v62.96,15.44
GND  (via drill 0.35)
  Top 0.17: J2.B12 164.54,51.23 164.54,51.08 J2.A1
  Top 0.305: U1.29_5 U1.29_4 | IC1.2 107,44
  other vias: 106,44 51,105 56,101 35,50 32,50 29,51
  pour Top: 6.52,43.9 6.5,43.88 6.47,43.87 0.08,43.87 0.08,0.08 73.92,0.08 73.92,10.02 73.94,10.04 73.96,10.06 73.98,10.08 92.22,10.08 92.24,10.06 92.26,10.04 92.28,10.02 92.28,0.08 170.12,0.08 170.12,67.12 92.18,67.12 92.16,67.14 92.14,67.16 92.12,67.18 92.12,111.12 68.08,111.12 68.08,110.58 68.07,110.56 68.05,110.54 68.02,110.52 19.98,110.52 19.95,110.54 19.93,110.56 19.92,110.58 19.92,111.12 0.08,111.12 0.08,62.16 6.47,62.16 6.5,62.14 6.52,62.12 6.53,62.1 6.53,43.93
  pour Bottom: 6.52,43.9 6.5,43.88 6.47,43.87 0.08,43.87 0.08,0.08 73.92,0.08 73.92,10.02 73.94,10.04 73.96,10.06 73.98,10.08 92.22,10.08 92.24,10.06 92.26,10.04 92.28,10.02 92.28,0.08 170.12,0.08 170.12,67.12 92.18,67.12 92.16,67.14 92.14,67.16 92.12,67.18 92.12,111.12 68.08,111.12 68.08,110.58 68.07,110.56 68.05,110.54 68.02,110.52 19.98,110.52 19.95,110.54 19.93,110.56 19.92,110.58 19.92,111.12 0.08,111.12 0.08,62.16 6.47,62.16 6.5,62.14 6.52,62.12 6.53,62.1 6.53,43.93
  pour Bottom: 12.08,14.08 82.92,14.08 82.92,59.92 12.08,59.92
GND1
  Top 0.305: J2.B5 159.7,56.05 R2-USB2.1
GPIO8
  Top 0.17: R1.1 19.01,41.73 19.01,43.96 19.16,44.1 U1.10
INT_RTC  (via drill 0.3)
  Top 0.17: R13.1 82.12,46.78 v82.12,47.37 82.12,49.01 81.97,49.15 81.97,50.19 U3.3 | v16.63,43.06 16.63,44.1 U1.8 | v15.89,37.42 16.78,36.53 INT_RTC.TP | v50.49,45.59 v52.27,47.37
  Bottom 0.17: 16.63,40.39 16.63,38.16 v15.89,37.42 | 16.63,40.39 v16.63,43.06 | v52.27,47.37 v82.12,47.37 | v50.49,45.59 28.36,45.59 23.17,40.39 16.63,40.39
IO/BOOT  (via drill 0.3)
  Top 0.17: R_BOOT.2 20.25,107.9 20.05,108.66 20.64,108.66 21.09,109.11 21.09,109.26 21.53,109.7 22.13,109.7 BOOT_BUTTON.4 22.27,109.85 25.69,109.85 BOOT_BUTTON.3 25.84,109.7 26.43,109.7 26.88,109.26 26.88,109.11 27.32,108.66 | 27.32,108.66 27.92,108.66 27.8,107.86 C6.1 | v24.35,62.96 24.35,61.78 U1.15 | 27.32,108.66 v27.18,108.51
  Bottom 0.17: v24.35,62.96 24.35,105.69 v27.18,108.51
IO/CHANGE  (via drill 0.3)
  Top 0.17: C10.1 67.79,107.86 67.86,108.66 67.27,108.66 66.83,109.11 66.83,109.26 66.38,109.7 65.78,109.7 CHANGE_BUTTON.3 65.64,109.85 62.37,109.85 CHANGE_BUTTON.4 62.22,109.7 61.63,109.7 61.18,109.26 61.18,109.11 v60.88,108.81 60.74,108.66 60.14,108.66 60.21,107.86 R_CHANGE.2 | v14.26,60.59 14.11,60.74 14.11,61.63 U1.23
  Bottom 0.17: v14.26,60.59 24.95,60.59 48.26,83.9 48.26,100.98 56.09,108.81 v60.88,108.81
MISO  (via drill 0.3)
  Top 0.17: 6.09,99.05 6.83,99.05 6.98,99.2 D6.2 | 6.09,99.05 4.75,99.05 R5.1 | 6.09,99.05 6.09,98.6 6.24,98.46 v6.24,94 6.09,93.85 5.05,93.85 J4.P7 | v32.22,54.05 32.22,54.5 U2.2 | v29.4,55.39 28.81,55.98 28.21,55.98 MISO.TP | v17.67,52.12 v9.21,60.59 9.06,60.74 9.06,61.63 U1.27
  Bottom 0.17: v32.22,54.05 30.74,54.05 v29.4,55.39 24.35,55.39 21.09,52.12 v17.67,52.12 | v6.24,94 6.24,89.99 5.79,89.55 5.79,64 v9.21,60.59
MOSI  (via drill 0.3)
  Top 0.17: 13.96,79 13.22,79 13.07,78.85 D7.2 | 13.96,79 15.3,79 R6.1 | v6.24,89.25 6.09,89.4 5.05,89.4 J4.P3 | 13.96,79 v13.96,79.15 | v82.27,15.3 82.27,14.55 J1.14 | v48.41,48.86 48.11,49.15 47.97,49.01 47.08,49.01 MOSI.TP 46.93,49.01 46.03,49.01 45.89,48.86 42.62,52.12 39.95,52.12 U2.5 39.8,51.98 39.35,51.98 v39.06,52.27 | 15.44,45.29 15.44,44.25 U1.7 | 15.44,45.29 v12.47,48.26 | 15.44,45.29 v15.59,45.44
  Bottom 0.17: v6.24,89.25 13.96,81.53 v13.96,79.15 13.96,61.48 12.03,59.55 12.03,48.71 v12.47,48.26 | v82.27,15.3 81.97,15.3 v48.41,48.86 | v15.59,45.44 17.08,45.44 26.43,54.8 28.81,54.8 31.33,52.27 v39.06,52.27
N$1
  Top 0.17: R2-USB1.2 159.79,53.01 164.39,53.01 J2.A5
N$2
  Top 0.17: J1.19 79.75,14.55 79.75,23.76 80.93,24.95 80.93,25.25 EPD_C7.2
N$3
  Top 0.305: MCP73831.1 122.25,50.05 121.69,50.6 118.15,50.6 117.65,50.1 R1_BAT.1
N$4
  Top 0.305: 106.58,46.33 106.41,46.33 106.05,45.97 IC1.1 | Q1.2 131.21,47.51 127.35,43.65 C1_BAT1.1 109.9,43.65 109.25,43 D2.1 108.05,42.95 106.98,41.88 106.98,40.43 106.82,40.27 105.88,40.27 105.27,40.88 105.27,45.02 106.58,46.33 | 106.58,46.33 107.59,46.33 107.95,45.97 IC1.3
N$5
  Top 0.305: CHG_LED.C 116.25,50.1 R1_BAT.2
N$6
  Top 0.17: J1.18 80.34,14.55 80.34,15 80.19,15.15 80.19,22.27 82.86,24.95 82.86,25.25 EPD_C6.2
N$7
  Top 0.305: MCP73831.5 120.7,49.25 120.1,48.65 R2_BAT.1
N$8
  Top 0.17: 87.76,35.94 88.36,35.94 90.14,37.72 90.14,38.31 C4.1 | 87.76,35.94 87.76,32.08 D3.2 | 87.76,35.94 D4.1
N$10
  Top 0.17: J1.20 79.3,14.55 79.3,24.65 79,24.95 79,25.25 EPD_C8.2
N$11
  Top 0.17: J1.22 78.26,14.55 78.26,21.83 75.14,24.95 75.14,25.25 EPD_C10.2
N$13
  Top 0.17: J1.24 77.22,14.55 73.51,14.55 70.54,17.52 70.24,17.52 EPD_C12.2
N$17
  Top 0.17: IC2.5 51.53,99.94 52.12,99.94 52.57,99.5 52.72,99.5 52.87,99.64 C_DELAY.1
N$22
  Top 0.17: J1.5 86.72,14.55 86.72,25.1 86.87,25.25 EPD_C2.2
N$23
  Top 0.17: J1.4 87.32,14.55 87.32,23.31 88.95,24.95 88.95,25.25 EPD_C1.2
N$26
  Top 0.305: R_CAPACITOR.1 74.96,56.09 D12.1
PREVGH  (via drill 0.3)
  Top 0.17: 77.52,24.5 77.07,24.95 77.07,25.25 EPD_C9.2 | 77.52,24.5 78.7,23.31 78.7,14.55 J1.21 | v84.35,39.2 84.35,39.95 D5.1 | 77.52,24.5 v77.67,24.65
  Bottom 0.17: v84.35,39.2 84.35,31.33 v77.67,24.65
PREVGL  (via drill 0.3)
  Top 0.17: 74.1,17.23 72.02,17.23 EPD_C11.2 | 74.1,17.23 75.73,17.23 77.81,15.15 77.81,14.55 J1.23 | v83.75,35.19 84.2,35.64 84.2,35.94 D4.2 | 74.1,17.23 v74.1,25.54
  Bottom 0.17: v74.1,25.54 v83.75,35.19
RESE  (via drill 0.3)
  Top 0.17: v87.47,13.66 87.61,13.66 87.76,13.81 87.76,14.4 J1.3 | v68.9,21.23 68.46,21.68 68.01,21.68 R2.1 67.86,21.68 67.72,21.83 67.57,21.83 63.71,17.97 63.71,16.04 Q4.2
  Bottom 0.17: v87.47,13.66 85.39,13.66 84.64,12.92 77.22,12.92 v68.9,21.23
RESE'
  Top 0.17: 63.85,12.03 64.45,12.03 R4.2 | 63.85,12.03 62.82,10.99 62.82,10.84 62.07,10.1 61.78,10.1 SJ1.2 | 63.85,12.03 63.71,12.18 63.71,12.47 68.01,16.78 68.01,20.34 R2.2
RESET  (via drill 0.3)
  Top 0.17: C5.1 52.79,107.86 52.87,108.66 52.27,108.66 51.83,109.11 51.83,109.26 51.38,109.7 50.79,109.7 RESET_BUTTON.3 50.64,109.85 47.37,109.85 RESET_BUTTON.4 47.22,109.7 46.63,109.7 45.89,108.96 45.89,108.51 45.74,108.36 | 45.74,108.36 45.44,108.66 44.99,108.66 44.96,108.72 R_RESET.2 | 45.74,108.36 45.89,108.22 45.89,106.62 48.71,103.8 v48.71,100.68 48.71,100.09 IC2.1 | v10.39,45.44 10.39,44.25 U1.3
  Bottom 0.17: v10.39,45.44 17.23,52.27 17.23,52.42 48.71,83.9 v48.71,100.68
RTC_RST  (via drill 0.3)
  Top 0.17: v28.51,62.07 27.03,60.59 23.17,60.59 23.02,60.74 23.02,61.63 U1.16 | v75.88,58.95 83.31,51.53 83.31,50.34 U3.4
  Bottom 0.17: v28.51,62.07 28.51,61.78 30.59,59.7 75.14,59.7 v75.88,58.95
RX
  Top 0.17: U1.24 12.92,61.78 12.92,66.19 13.37,66.64 13.37,66.68 13.07,66.97 RX.TP
SCK  (via drill 0.3)
  Top 0.17: 10.84,99.05 10.25,99.05 10.1,99.2 D8.2 | 10.84,99.05 12.32,99.05 R7.1 12.47,99.05 12.47,103.8 12.03,104.25 12.03,104.99 SCK.TP | 10.84,99.05 10.84,96.38 v6.68,92.22 6.09,91.62 5.05,91.62 J4.P5 | v82.86,15.3 82.72,15.15 82.72,14.55 J1.13 | 40.09,52.87 39.65,53.31 39.8,53.46 U2.6 | v38.61,52.87 39.2,52.87 39.35,52.72 39.95,52.72 40.09,52.87 | U1.6 14.11,44.25 14.11,45.29 v14.26,45.44 12.03,47.67 12.03,48.56 v12.47,49.01 | 40.09,52.87 v40.24,52.72
  Bottom 0.17: v82.86,15.3 82.86,15.44 45.59,52.72 v40.24,52.72 | v14.26,45.44 14.85,45.44 24.5,55.09 28.96,55.09 31.18,52.87 v38.61,52.87 | v6.68,92.22 6.68,89.25 14.4,81.53 14.4,61.48 12.47,59.55 v12.47,49.01
SCL  (via drill 0.3)
  Top 0.17: v18.12,62.96 17.97,62.82 17.97,61.78 U1.20 | v27.32,61.63 v26.29,62.67 | v79.3,58.21 79.45,58.36 79.45,59.55 U3.16 79.45,59.7 79.45,60.88 v79.6,61.03 | R2_PINH.1 149.09,16.34 v149.09,15.59 149.09,15 148.65,14.55 148.65,13.81 SENSOR2.4 | v133.8,54.2 133.65,54.35 133.5,54.2 133.06,54.2 U4.7 | v164.24,21.09 164.69,20.64 165.13,20.64 165.28,20.79 J3.4
  Bottom 0.17: v18.12,62.96 18.71,62.96 19.45,62.22 25.84,62.22 v26.29,62.67 | v27.32,61.63 27.77,61.63 30.29,59.1 74.55,59.1 75.44,58.21 v79.3,58.21 | v149.09,15.59 160.68,15.59 164.54,19.45 164.54,20.79 v164.24,21.09 133.8,51.53 v133.8,54.2 133.8,55.24 128.01,61.03 v79.6,61.03
SDA  (via drill 0.3)
  Top 0.17: v19.45,62.96 19.3,62.82 19.3,61.78 U1.19 | v27.77,62.07 v26.73,63.11 | v80.49,58.21 80.93,58.66 80.93,59.4 80.78,59.55 U3.15 | v133.06,55.24 133.06,54.8 U4.8 | 147.76,16.48 147.46,16.19 147.31,16.19 147.16,16.34 R1_PINH.1 | 147.76,16.48 147.91,16.34 147.91,13.81 SENSOR2.3 | 147.76,16.48 v147.91,16.63 | v164.09,19.75 165.28,19.75 J3.3
  Bottom 0.17: v19.45,62.96 23.61,62.96 24.06,62.52 25.39,62.52 25.99,63.11 v26.73,63.11 | v27.77,62.07 30.44,59.4 74.69,59.4 75.59,58.51 78.85,58.51 79,58.66 80.04,58.66 v80.49,58.21 130.09,58.21 v133.06,55.24 133.06,31.48 v147.91,16.63 151.02,19.75 v164.09,19.75
SRC  (via drill 0.3)
  Top 0.17: C4.2 88.65,39.65 88.36,39.95 87.76,39.95 D5.2 87.61,40.09 85.98,40.09 84.35,38.46 78.11,38.46 78.03,38.38 | v69.65,30 62.96,23.31 62.96,18.12 Q4.3 | v78.03,35.83 78.03,38.38 | 78.03,38.38 77.96,38.31 L1.1
  Bottom 0.17: v78.03,35.83 72.2,30 v69.65,30
SS_SD  (via drill 0.3)
  Top 0.17: 9.06,79 9.8,79 9.95,78.85 D11.2 | 9.06,79 7.72,79 R10.1 | v10.54,46.33 11.58,45.29 11.58,44.25 U1.4 | 9.06,79 v9.06,78.85 | v6.53,88.21 6.39,88.36 5.5,88.36 J4.P2
  Bottom 0.17: v10.54,46.33 10.54,77.37 v9.06,78.85 6.53,81.38 v6.53,88.21
TX
  Top 0.17: U1.25 11.58,61.78 11.58,68.9 10.99,69.5 TX.TP
USB_D+  (via drill 0.3)
  Top 0.17: v153.99,46.63 154.29,46.33 154.29,46.18 154.44,46.03 155.18,46.03 D1.4 | v132.61,50.19 v134.24,51.83 | v50.94,45.14 v52.72,46.93 | v26.14,42.62 24.65,44.1 24.35,44.1 U1.14
  Bottom 0.17: v153.99,46.63 139.44,46.63 v134.24,51.83 | v132.61,50.19 85.68,50.19 82.42,46.93 v52.72,46.93 | v50.94,45.14 28.66,45.14 v26.14,42.62
USB_D-  (via drill 0.3)
  Top 0.17: v154.29,47.97 155.18,47.97 D1.6 | v29.55,61.48 29.55,59.4 26.73,56.58 v26.73,54.35 | v21.83,46.63 22.72,45.74 22.72,44.4 22.87,44.25 U1.13
  Bottom 0.17: v154.29,47.97 141.52,47.97 128.01,61.48 v29.55,61.48 | v26.73,54.35 26.73,51.53 v21.83,46.63
VBAT
  Top 0.17: U4.3 130.98,53.76 130.98,54.2 U4.2
  Top 0.305: U4.3 130.62,53.75 130.26,53.38 Q1.3 | U4.2 126.5,54.25 126.1,54.65 C2_BAT.1 | C2_BAT.1 125.57,54.65 123.3,52.38 MCP73831.3 | VBAT.TP 84,73 94,63 117.65,63 C2_BAT.1
VBUS
  Top 0.305: 129.31,47.61 128.9,48.02 118.43,48.02 117.02,49.43 117.02,50.57 118.41,51.95 MCP73831.4 117.8,51.95 CHG_LED.A 117.07,52.68 114.23,52.68 113.65,52.1 C1_BAT.1 113.65,50.04 106.61,43 D2.2 105.95,41.5 106.35,41.1 R1_PWRUSB.2 | 129.31,47.61 129.99,48.29 140.38,48.29 VBUS.TP 151.31,42.44 PFMF.050.1.2 151.75,46.52 152.23,47 D1.2 151.77,47 151.07,47.7 C4_USB.1 150.96,47.91 C5_USB.1 | 129.31,47.61 Q1.1
VRTC
  Top 0.305: C1.1 81.35,61.9 82,61.26 U3.14 | C10_SUPERCAP.1 80.9,62.55 81.35,62.1 C1.1 | C1.1 76.81,62 75.06,60.25 R_CAPACITOR.2
VUSB
  Top 0.17: J2.A4 164.54,51.83 164.54,51.98 J2.B9 164.54,52.12 165.28,52.12 165.73,52.57 165.73,55.98 165.13,56.58 164.54,56.58 | 164.54,56.58 164.54,56.73 J2.A9 | 164.54,56.58 J2.B4
  Top 0.305: J2.A4 163.88,51.75 156.25,44.12 PFMF.050.1.1